# Altium PCB PCB_L.pcbdoc
Units mil, origin at the board's own origin, x right, y up, seen from the top; angles counter-clockwise.
Board outline 2085.35 x 3871.73 mil, 2 copper layers (Top Layer, Bottom Layer); 2 components, 0 nets, 8 pads, 5 vias.
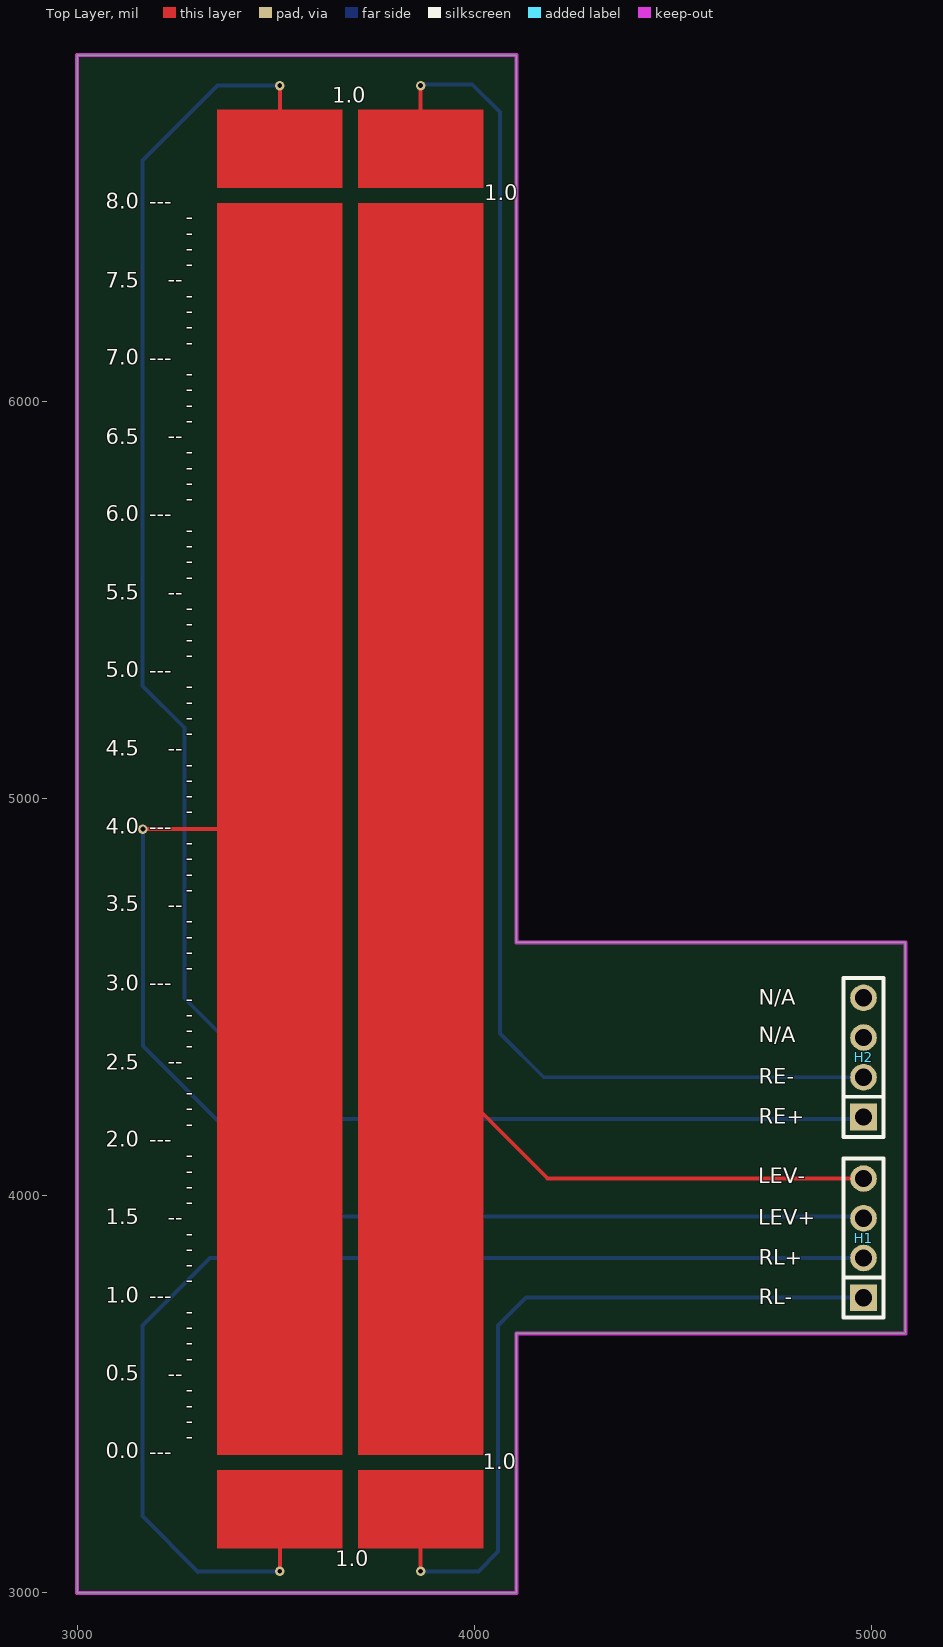
[diagram p0: Top Layer view]
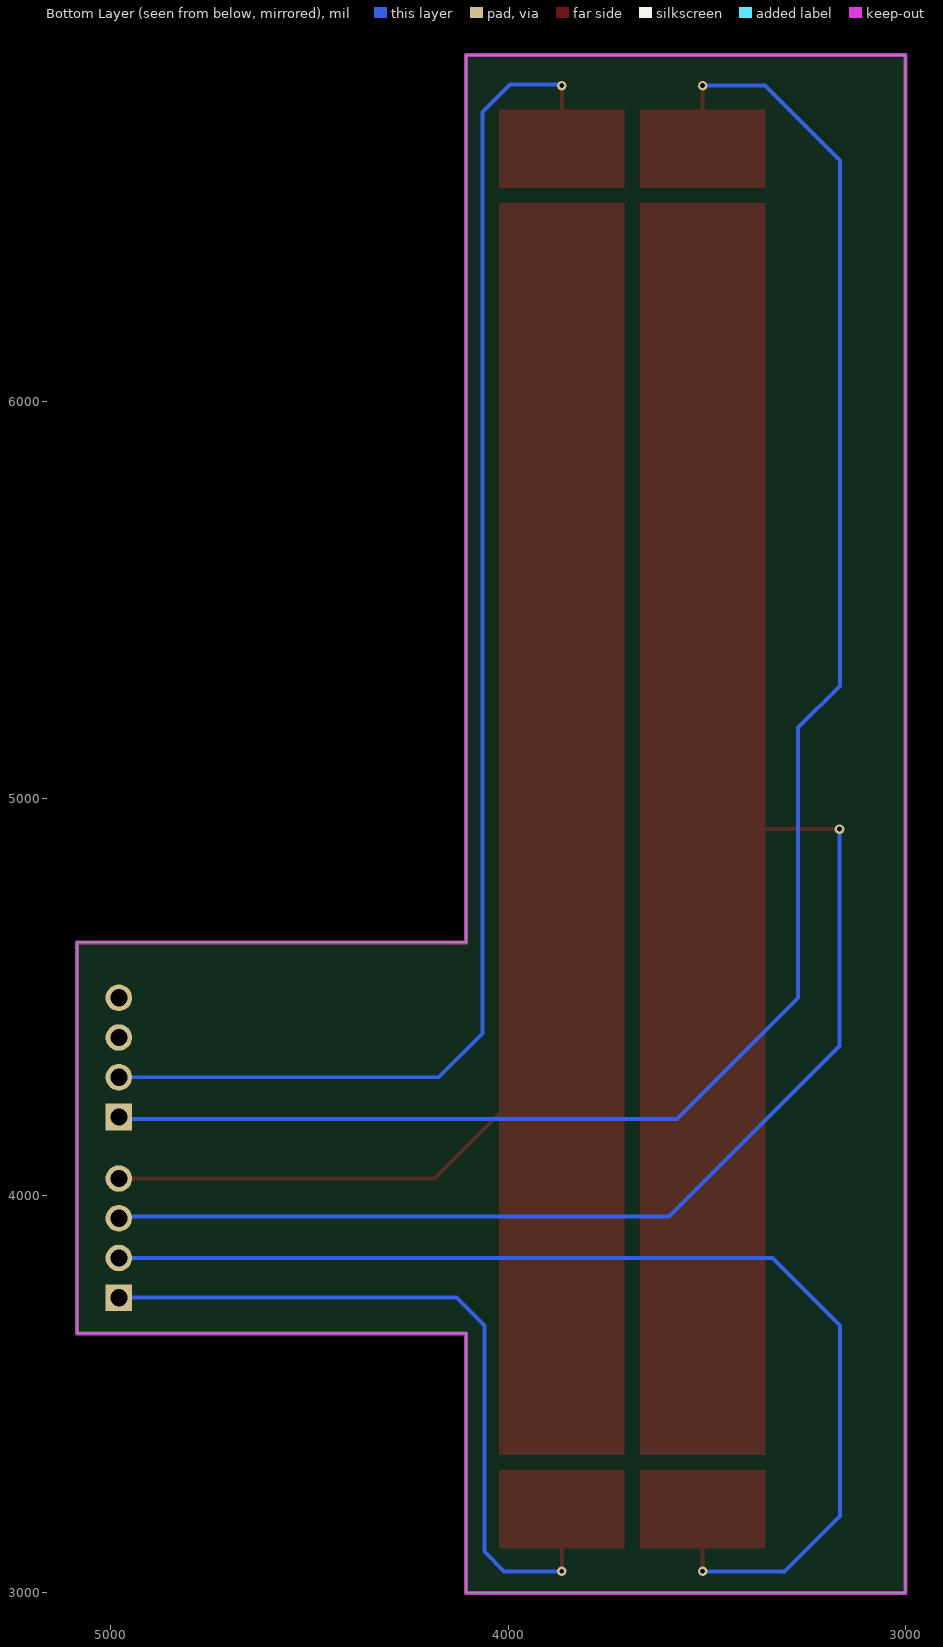
[diagram p1: Bottom Layer view, seen from below]

## Layer stack, top to bottom
Top Layer: signal copper (thickness not stored)
Dielectric: dielectric 12.6, FR-4, Dk 4.8
Bottom Layer: signal copper (thickness not stored)

## Board outline
3000,3000 4106.1,3000 4106.1,3653.7 5085.35,3653.7 5085.35,4637.95 4106.1,4637.95 4106.1,6871.73 3000,6871.73

## Components (designator, comment, footprint, x,y, rotation, side; value= is the part's Value field where it differs from the comment)
H1 "PH-00316" HDR-TH_4P-P2.54-V-M 4980,3893.31 r90 top
H2 "PH-00316" HDR-TH_4P-P2.54-V-M 4980,4348.31 r90 top

## Footprints (in the part's own frame and the unit in brackets; to place one, negate y for a bottom-side part, rotate by r counter-clockwise, add the part's x,y. Pads: shape width x height; smd on the part's side, far side on the other; paste and mask are expansions set on the pad)
HDR-TH_4P-P2.54-V-M [mm]
  rect 1.7x1.7 hole 1.1 paste+0 mask+0.051: 1(-3.81,0)
  round 1.7 hole 1.1 paste+0 mask+0.051: 2(-1.27,0) 3(1.27,0) 4(3.81,0)
  silkscreen extent -5.08,-1.27 5.08,1.27

## Via types
v1: diameter 24.02, hole 12.01, Top Layer to Bottom Layer, 5 vias

## Nets (pads, with @x,y where several pads share a name; then routed paths per layer and width w, separated by ;. In a path a pad name is that pad's centre, name@x,y a point inside that pad or via, vN(x,y) a via of type N, cw(c..) or ccw(c..) an arc to the next point about the centre after c; other vN are vias at no path point)
pads on no net: H1.1 H1.2 H1.3 H1.4 H2.1 H2.2 H2.3 H2.4
copper on no net: | length 17748.4
  Top Layer w10: v1(3165.81,4923.23) 3510.55,4923.23 ; v1(3510.55,3054.46) 3510.55,3210.63 ; 3510.55,6635.83 v1(3510.55,6794.88) ; v1(3864.88,3054.46) 3864.88,3210.63 ; 3864.88,4923.23 3864.88,4363.43 4185,4043.31 4980,4043.31 ; 3864.88,6635.83 v1(3864.88,6794.88)
  Bottom Layer w10: v1(3165.81,4923.23) 3165.81,4377.5 3595,3948.31 4975,3948.31 4980,3943.31 ; v1(3510.55,3054.46) 3306.15,3054.46 3305,3053.31 3165,3193.31 3165,3673.31 3335,3843.31 4980,3843.31 ; v1(3510.55,6794.88) 3353.97,6794.88 3165,6605.92 3165,5283.31 3270,5178.31 3270,4498.31 3575,4193.31 4975,4193.31 4980,4198.31 ; v1(3864.88,3054.46) 4010.54,3054.46 4060,3103.92 4060,3673.31 4130,3743.31 4980,3743.31 ; v1@3864.88,6797.79 3995,6797.79 4065,6727.79 4065,4408.31 4175,4298.31 4980,4298.31

## Keep-outs
Board Outline Layer:
  the board outline again, w10

## Other copper
Top Layer:
  region: 3707.4,3348.43 4022.36,3348.43 4022.36,6498.03 3707.4,6498.03
  region: 3353.07,6537.4 3668.03,6537.4 3668.03,6734.25 3353.07,6734.25
  region: 3707.4,6537.4 4022.36,6537.4 4022.36,6734.25 3707.4,6734.25
  region: 3353.07,3348.43 3668.03,3348.43 3668.03,6498.03 3353.07,6498.03
  region: 3353.07,3112.2 3668.03,3112.2 3668.03,3309.06 3353.07,3309.06
  region: 3707.4,3112.2 4022.36,3112.2 4022.36,3309.06 3707.4,3309.06

## Silkscreen, mask and mechanical layers (free items; w line width, h text height)
Top Silkscreen Layer:
  text "1.0" at 3643.13,6751.89 h38.33
  text "1.0" at 4025.33,6505.99 h38.33
  text "8.0" at 3072.03,6484.94 h38.33
  text "---" at 3181.73,6484.65 h38.33
  text "-" at 3273.8,6445.16 h38.61
  text "-" at 3273.8,6405.81 h38.61
  text "-" at 3273.8,6366.45 h38.61
  text "-" at 3273.8,6327.1 h38.61
  text "--" at 3227.81,6287.89 h38.33
  text "7.5" at 3072.03,6285.43 h38.33
  text "-" at 3273.8,6248.4 h38.61
  text "-" at 3273.8,6209.04 h38.61
  text "-" at 3273.8,6169.69 h38.61
  text "-" at 3273.8,6130.34 h38.61
  text "7.0" at 3072.03,6091.85 h38.33
  text "---" at 3181.73,6091.12 h38.33
  text "-" at 3273.8,6051.63 h38.61
  text "-" at 3273.8,6012.28 h38.61
  text "-" at 3273.8,5972.92 h38.61
  text "-" at 3273.8,5933.57 h38.61
  text "--" at 3227.81,5894.36 h38.33
  text "6.5" at 3072.03,5892.34 h38.33
  text "-" at 3273.8,5854.87 h38.61
  text "-" at 3273.8,5815.51 h38.61
  text "-" at 3273.8,5776.16 h38.61
  text "-" at 3273.8,5736.81 h38.61
  text "6.0" at 3072.03,5697.78 h38.33
  text "---" at 3181.73,5697.59 h38.33
  text "-" at 3273.8,5658.1 h38.61
  text "-" at 3273.8,5618.75 h38.61
  text "-" at 3273.8,5579.4 h38.61
  text "-" at 3273.8,5540.04 h38.61
  text "--" at 3227.81,5500.83 h38.33
  text "5.5" at 3072.03,5500.24 h38.33
  text "-" at 3273.8,5461.34 h38.61
  text "-" at 3273.8,5421.98 h38.61
  text "-" at 3273.8,5382.63 h38.61
  text "-" at 3273.8,5343.28 h38.61
  text "5.0" at 3072.03,5304.69 h38.33
  text "---" at 3181.73,5304.06 h38.33
  text "-" at 3273.8,5264.57 h38.61
  text "-" at 3273.8,5225.22 h38.61
  text "-" at 3273.8,5185.87 h38.61
  text "-" at 3273.8,5146.51 h38.61
  text "4.5" at 3072.03,5107.16 h38.33
  text "--" at 3227.81,5107.3 h38.33
  text "-" at 3273.8,5067.81 h38.61
  text "-" at 3273.8,5028.45 h38.61
  text "-" at 3273.8,4989.1 h38.61
  text "-" at 3273.8,4949.75 h38.61
  text "4.0" at 3072.03,4911.6 h38.33
  text "---" at 3181.73,4910.53 h38.33
  text "-" at 3273.8,4871.04 h38.61
  text "-" at 3273.8,4831.69 h38.61
  text "-" at 3273.8,4792.34 h38.61
  text "-" at 3273.8,4752.98 h38.61
  text "3.5" at 3072.03,4716.05 h38.33
  text "--" at 3227.81,4713.77 h38.33
  text "-" at 3273.8,4674.28 h38.61
  text "-" at 3273.8,4634.92 h38.61
  text "-" at 3273.8,4595.57 h38.61
  text "-" at 3273.8,4556.22 h38.61
  text "3.0" at 3072.03,4516.54 h38.33
  text "---" at 3181.73,4517.01 h38.33
  text "N/A" at 4716.73,4481.42 h38.33
  text "-" at 3273.8,4477.51 h38.61
  text "-" at 3273.8,4438.16 h38.61
  text "-" at 3273.8,4398.81 h38.61
  text "N/A" at 4716.73,4386.42 h38.33
  text "-" at 3273.8,4359.45 h38.61
  text "--" at 3227.81,4320.24 h38.33
  text "2.5" at 3072.03,4317.03 h38.33
  text "-" at 3273.8,4280.75 h38.61
  text "RE-" at 4716.73,4281.42 h38.33
  text "-" at 3273.8,4241.4 h38.61
  text "-" at 3273.8,4202.04 h38.61
  text "RE+" at 4716.73,4181.89 h38.33
  text "-" at 3273.8,4162.69 h38.61
  text "2.0" at 3072.03,4123.45 h38.33
  text "---" at 3181.73,4123.48 h38.33
  text "-" at 3273.8,4083.98 h38.61
  text "-" at 3273.8,4044.63 h38.61
  text "LEV-" at 4715.04,4031.42 h38.33
  text "-" at 3273.8,4005.28 h38.61
  text "-" at 3273.8,3965.92 h38.61
  text "1.5" at 3072.03,3927.9 h38.33
  text "--" at 3227.81,3926.71 h38.33
  text "LEV+" at 4715.04,3926.89 h38.33
  text "-" at 3273.8,3887.22 h38.61
  text "-" at 3273.8,3847.87 h38.61
  text "RL+" at 4716.73,3826.42 h38.33
  text "-" at 3273.8,3808.51 h38.61
  text "-" at 3273.8,3769.16 h38.61
  text "1.0" at 3072.03,3730.37 h38.33
  text "---" at 3181.73,3729.95 h38.33
  text "RL-" at 4716.73,3726.89 h38.33
  text "-" at 3273.8,3690.45 h38.61
  text "-" at 3273.8,3651.1 h38.61
  text "-" at 3273.8,3611.75 h38.61
  text "-" at 3273.8,3572.4 h38.61
  text "0.5" at 3072.03,3534.81 h38.33
  text "--" at 3227.81,3533.18 h38.33
  text "-" at 3273.8,3493.69 h38.61
  text "-" at 3273.8,3454.34 h38.61
  text "-" at 3273.8,3414.98 h38.61
  text "-" at 3273.8,3375.63 h38.61
  text "0.0" at 3072.03,3339.26 h38.33
  text "---" at 3181.73,3336.42 h38.33
  text "1.0" at 4021.73,3311.42 h38.33
  text "1.0" at 3650.33,3066.89 h38.33
Top Solder Mask Layer:
  region: 3353.07,6537.4 3668.03,6537.4 3668.03,6734.25 3353.07,6734.25
  region: 3707.4,6537.4 4022.36,6537.4 4022.36,6734.25 3707.4,6734.25
  region: 3353.07,3348.43 3668.03,3348.43 3668.03,6498.03 3353.07,6498.03
  region: 3353.07,3112.2 3668.03,3112.2 3668.03,3309.06 3353.07,3309.06
  region: 3707.4,3112.2 4022.36,3112.2 4022.36,3309.06 3707.4,3309.06
  region: 3707.4,3348.43 4022.36,3348.43 4022.36,6498.03 3707.4,6498.03